# EAGLE board midi_nubbin_stencil (EAGLE 6.6.0)
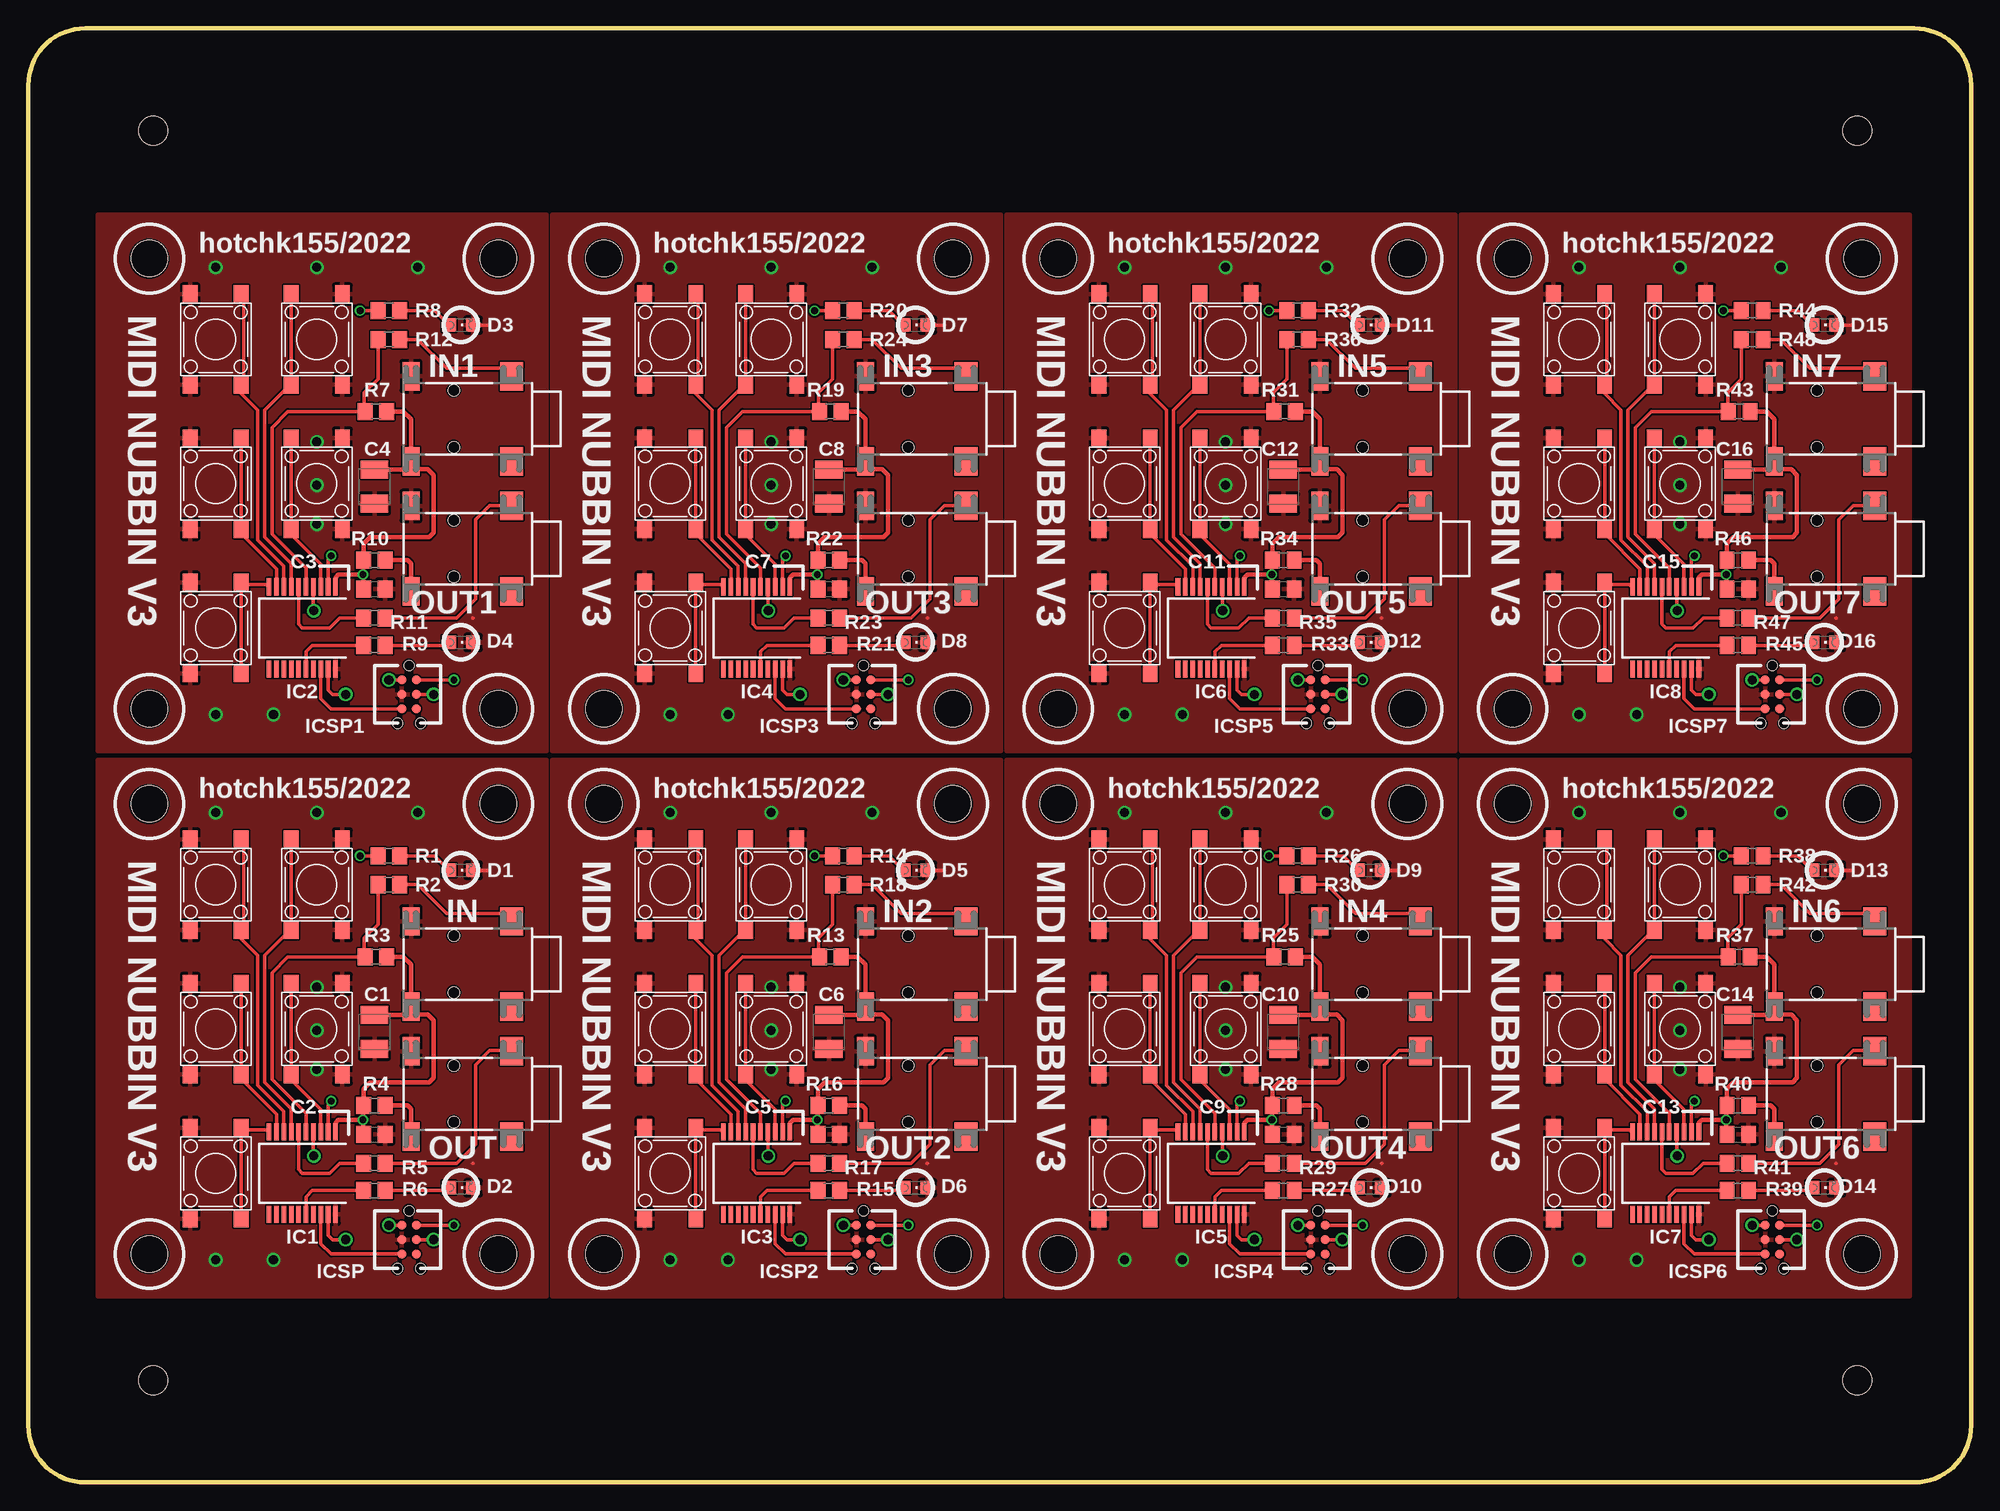
[diagram p0: board, top side]
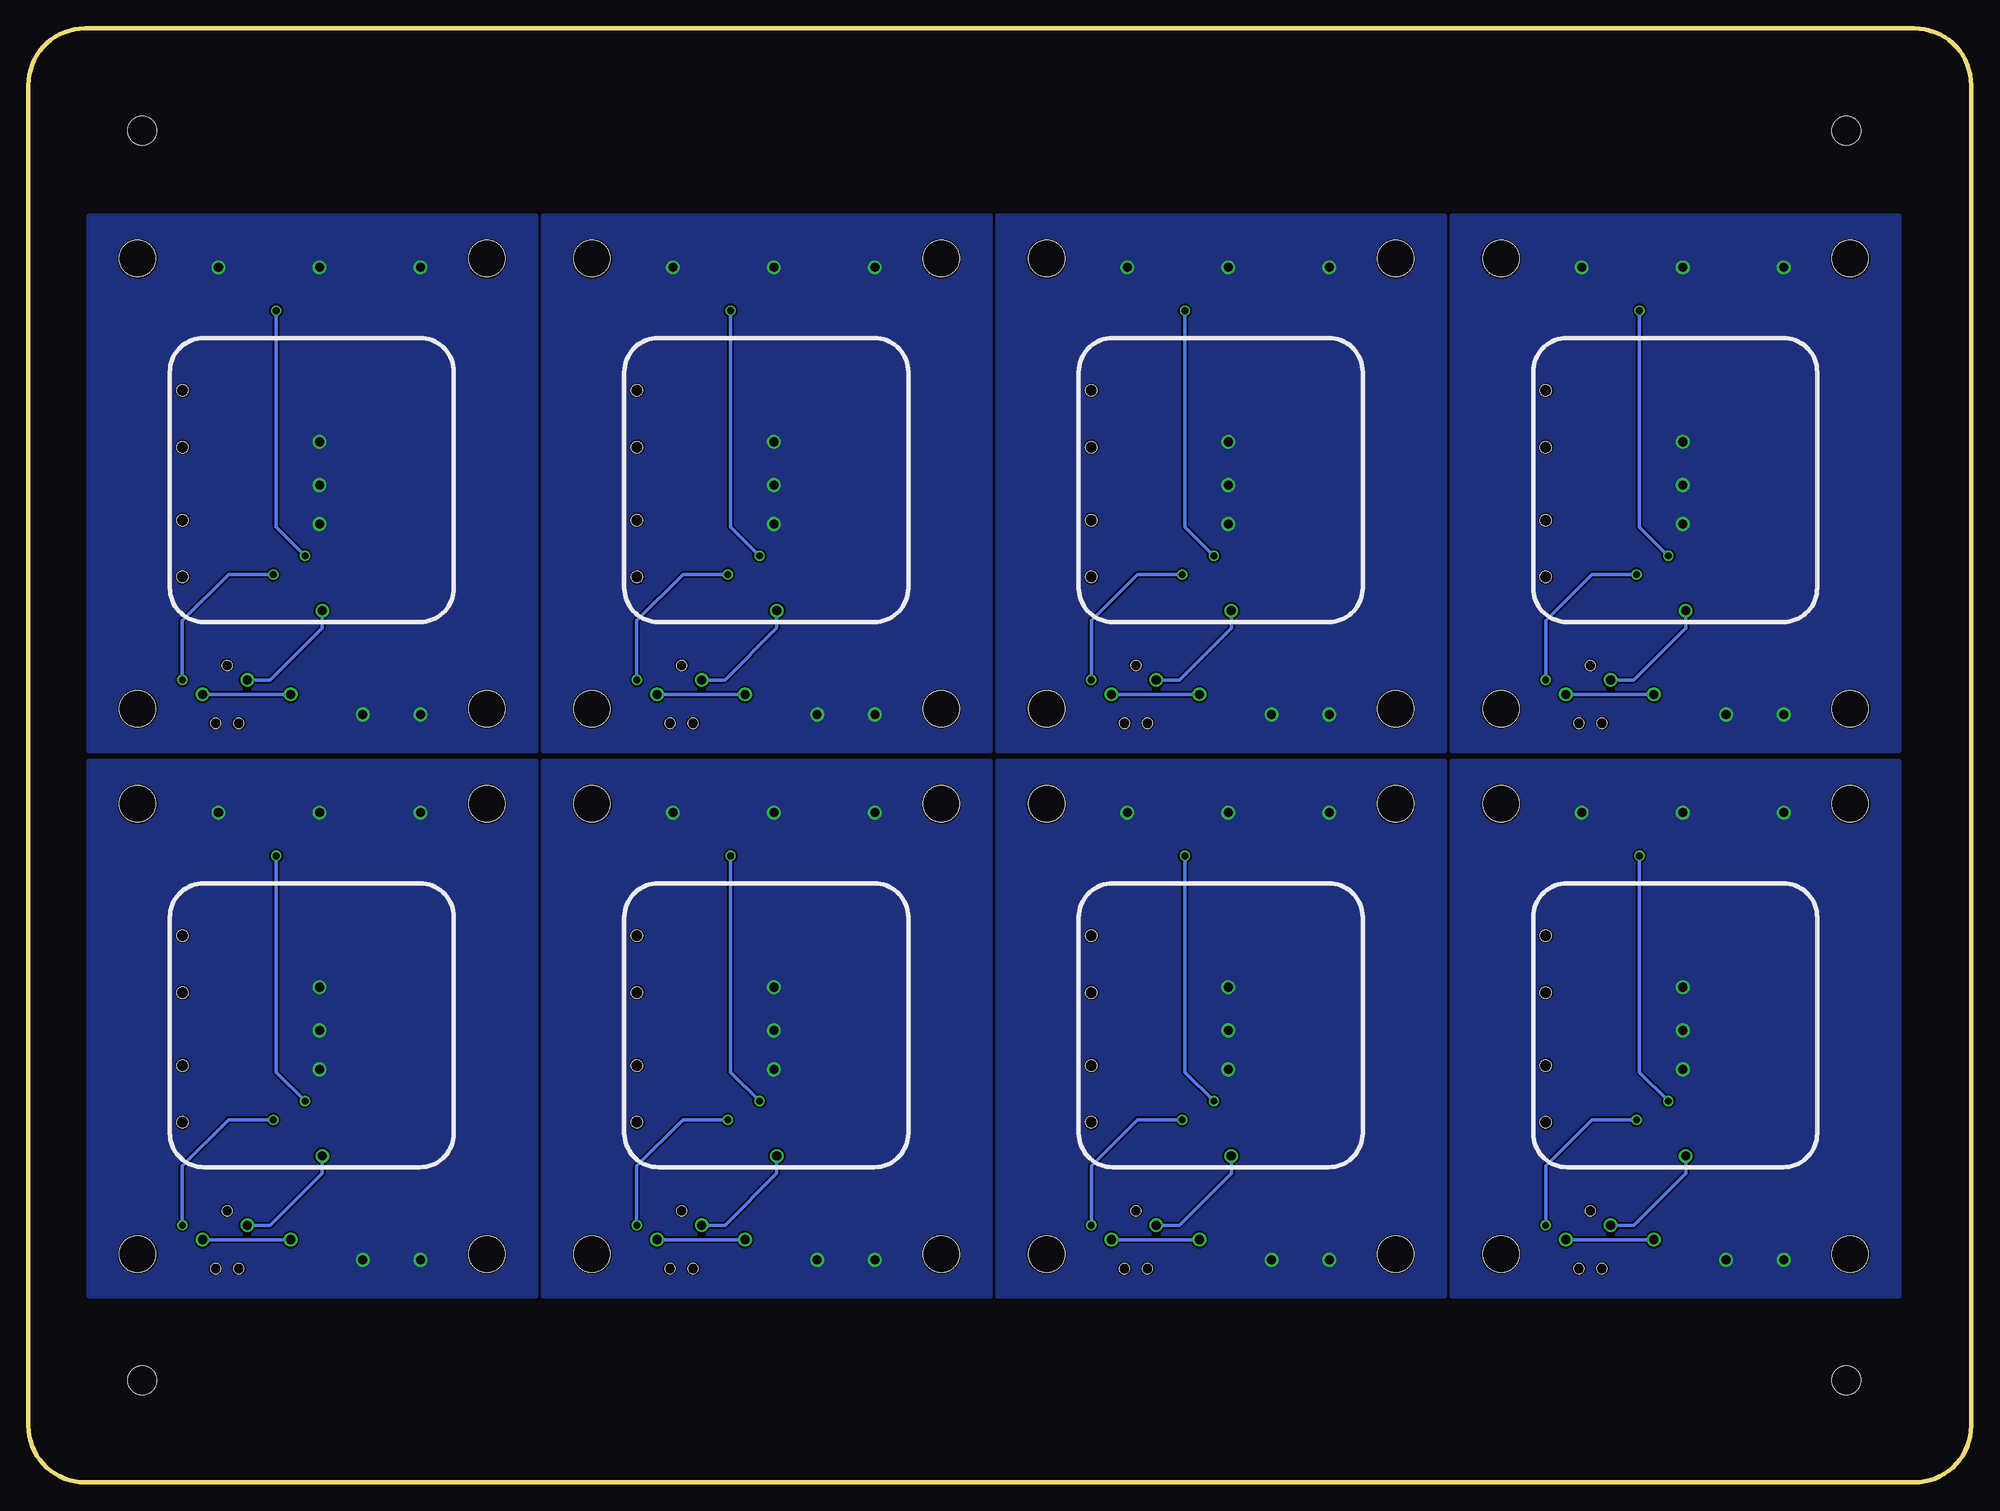
[diagram p1: board, bottom side, seen from below]

Size 171 x 128 mm. Coordinates in mm from the lower left corner, seen from the top.
Outline: 0,123 0,5 arc90 5,0 166,0 arc90 171,5 171,123 arc90 166,128 5,128 arc90 0,123
Copper layers (1*16): Top 0.035mm / dielectric 1.5mm / Bottom 0.035mm
Design rules "hackvana": minimum track width 6mil, minimum drill 0.3mm, track to track 6mil, track to pad 9mil, pad to pad 6mil, via to via 6mil, smd to smd 0mil, copper to edge 6mil, drill to drill 6mil, minimum pad ring 10mil, minimum via ring 6mil, stop-mask expansion 2mil, vias tented up to drill 100mil, thermal gap 10mil
Holes 3.2 mm at 10.65,59.73 10.65,20.11 41.38,59.73 41.38,20.11 10.65,107.73 10.65,68.11 41.38,107.73 41.38,68.11 50.65,59.73 50.65,20.11 81.38,59.73 81.38,20.11 50.65,107.73 50.65,68.11 81.38,107.73 81.38,68.11 90.65,59.73 90.65,20.11 121.38,59.73 121.38,20.11 90.65,107.73 90.65,68.11 121.38,107.73 121.38,68.11 130.65,59.73 130.65,20.11 161.38,59.73 161.38,20.11 130.65,107.73 130.65,68.11 161.38,107.73 161.38,68.11
Holes 2.54 mm at 11,119 11,9 161,119 161,9

## Footprints (pad centres in the part's own frame; a part is rotated, then mirrored left to right if it is on the bottom)
SMC_B = smd 1.6 x 2.4: + -1.5,0; - 1.5,0
C0805 = smd 1.3 x 1.5: 1 -0.95,0; 2 0.95,0
CHIPLED_0805 = smd 1.2 x 1.2: A 0,-1.05; C 0,1.05
SSOP20 = smd 0.4 x 1.5: 1 -2.925,-3.625; 2 -2.275,-3.625; 3 -1.625,-3.625; 4 -0.975,-3.625; 5 -0.325,-3.625; 6 0.325,-3.625; 7 0.975,-3.625; 8 1.625,-3.625; 9 2.275,-3.625; 10 2.925,-3.625; 11 2.925,3.625; 12 2.275,3.625; 13 1.625,3.625; 14 0.975,3.625; 15 0.325,3.625; 16 -0.325,3.625; 17 -0.975,3.625; 18 -1.625,3.625; 19 -2.275,3.625; 20 -2.925,3.625
TC2030-MCP-NL = smd 0.787 x 0.787: 1 1.27,-0.635; 2 1.27,0.635; 3 2.54,-0.635; 4 2.54,0.635; 5 3.81,-0.635; 6 3.81,0.635 | hole 0.889: 0,0; 5.08,-1.016; 5.08,1.016
1503_02 = smd 2.5 x 1.5: 1 -3.75,-10.75; 3 3.75,-10.75 | smd 2.5 x 2: 2 -3.75,-1.9; 2@2 3.75,-1.9 | hole 1: -2.5,-7; 2.5,-7
R0805 = smd 1.3 x 1.5: 1 -0.95,0; 2 0.95,0
6MMTACTSMT = smd 1.55 x 1.3: 1 -4,2.25; 2 -4,-2.25; 3 4,-2.25; 4 4,2.25

## Placement (x,y rotation side)
C1  [SMC_B]  30.46,39.67 270 top
C2  [C0805]  30.46,30.65 0 top
C3  [C0805]  30.46,78.65 0 top
C4  [SMC_B]  30.46,87.67 270 top
C5  [C0805]  70.46,30.65 0 top
C6  [SMC_B]  70.46,39.67 270 top
C7  [C0805]  70.46,78.65 0 top
C8  [SMC_B]  70.46,87.67 270 top
C9  [C0805]  110.46,30.65 0 top
C10  [SMC_B]  110.46,39.67 270 top
C11  [C0805]  110.46,78.65 0 top
C12  [SMC_B]  110.46,87.67 270 top
C13  [C0805]  150.46,30.65 0 top
C14  [SMC_B]  150.46,39.67 270 top
C15  [C0805]  150.46,78.65 0 top
C16  [SMC_B]  150.46,87.67 270 top
D1  [CHIPLED_0805]  38.08,53.89 270 top
D2  [CHIPLED_0805]  38.08,25.95 270 top
D3  [CHIPLED_0805]  38.08,101.89 270 top
D4  [CHIPLED_0805]  38.08,73.95 270 top
D5  [CHIPLED_0805]  78.08,53.89 270 top
D6  [CHIPLED_0805]  78.08,25.95 270 top
D7  [CHIPLED_0805]  78.08,101.89 270 top
D8  [CHIPLED_0805]  78.08,73.95 270 top
D9  [CHIPLED_0805]  118.08,53.89 270 top
D10  [CHIPLED_0805]  118.08,25.95 270 top
D11  [CHIPLED_0805]  118.08,101.89 270 top
D12  [CHIPLED_0805]  118.08,73.95 270 top
D13  [CHIPLED_0805]  158.08,53.89 270 top
D14  [CHIPLED_0805]  158.08,25.95 270 top
D15  [CHIPLED_0805]  158.08,101.89 270 top
D16  [CHIPLED_0805]  158.08,73.95 270 top
IC1  PIC16F15345SSOP20  [SSOP20]  24.11,27.22 180 top
IC2  PIC16F15345SSOP20  [SSOP20]  24.11,75.22 180 top
IC3  PIC16F15345SSOP20  [SSOP20]  64.11,27.22 180 top
IC4  PIC16F15345SSOP20  [SSOP20]  64.11,75.22 180 top
IC5  PIC16F15345SSOP20  [SSOP20]  104.11,27.22 180 top
IC6  PIC16F15345SSOP20  [SSOP20]  104.11,75.22 180 top
IC7  PIC16F15345SSOP20  [SSOP20]  144.11,27.22 180 top
IC8  PIC16F15345SSOP20  [SSOP20]  144.11,75.22 180 top
ICSP  [TC2030-MCP-NL]  33.51,23.92 270 top
ICSP1  [TC2030-MCP-NL]  33.51,71.92 270 top
ICSP2  [TC2030-MCP-NL]  73.51,23.92 270 top
ICSP3  [TC2030-MCP-NL]  73.51,71.92 270 top
ICSP4  [TC2030-MCP-NL]  113.51,23.92 270 top
ICSP5  [TC2030-MCP-NL]  113.51,71.92 270 top
ICSP6  [TC2030-MCP-NL]  153.51,23.92 270 top
ICSP7  [TC2030-MCP-NL]  153.51,71.92 270 top
IN  1503_02  [1503_02]  44.43,45.64 270 top
IN1  1503_02  [1503_02]  44.43,93.64 270 top
IN2  1503_02  [1503_02]  84.43,45.64 270 top
IN3  1503_02  [1503_02]  84.43,93.64 270 top
IN4  1503_02  [1503_02]  124.43,45.64 270 top
IN5  1503_02  [1503_02]  124.43,93.64 270 top
IN6  1503_02  [1503_02]  164.43,45.64 270 top
IN7  1503_02  [1503_02]  164.43,93.64 270 top
OUT  1503_02  [1503_02]  44.43,34.2 270 top
OUT1  1503_02  [1503_02]  44.43,82.2 270 top
OUT2  1503_02  [1503_02]  84.43,34.2 270 top
OUT3  1503_02  [1503_02]  84.43,82.2 270 top
OUT4  1503_02  [1503_02]  124.43,34.2 270 top
OUT5  1503_02  [1503_02]  124.43,82.2 270 top
OUT6  1503_02  [1503_02]  164.43,34.2 270 top
OUT7  1503_02  [1503_02]  164.43,82.2 270 top
R1  [R0805]  31.73,55.16 180 top
R2  220  [R0805]  31.73,52.62 0 top
R3  4k7  [R0805]  30.59,46.27 0 top
R4  [R0805]  30.46,33.19 180 top
R5  220  [R0805]  30.46,28.11 180 top
R6  [R0805]  30.46,25.7 180 top
R7  4k7  [R0805]  30.59,94.27 0 top
R8  [R0805]  31.73,103.16 180 top
R9  [R0805]  30.46,73.7 180 top
R10  [R0805]  30.46,81.19 180 top
R11  220  [R0805]  30.46,76.11 180 top
R12  220  [R0805]  31.73,100.62 0 top
R13  4k7  [R0805]  70.59,46.27 0 top
R14  [R0805]  71.73,55.16 180 top
R15  [R0805]  70.46,25.7 180 top
R16  [R0805]  70.46,33.19 180 top
R17  220  [R0805]  70.46,28.11 180 top
R18  220  [R0805]  71.73,52.62 0 top
R19  4k7  [R0805]  70.59,94.27 0 top
R20  [R0805]  71.73,103.16 180 top
R21  [R0805]  70.46,73.7 180 top
R22  [R0805]  70.46,81.19 180 top
R23  220  [R0805]  70.46,76.11 180 top
R24  220  [R0805]  71.73,100.62 0 top
R25  4k7  [R0805]  110.59,46.27 0 top
R26  [R0805]  111.73,55.16 180 top
R27  [R0805]  110.46,25.7 180 top
R28  [R0805]  110.46,33.19 180 top
R29  220  [R0805]  110.46,28.11 180 top
R30  220  [R0805]  111.73,52.62 0 top
R31  4k7  [R0805]  110.59,94.27 0 top
R32  [R0805]  111.73,103.16 180 top
R33  [R0805]  110.46,73.7 180 top
R34  [R0805]  110.46,81.19 180 top
R35  220  [R0805]  110.46,76.11 180 top
R36  220  [R0805]  111.73,100.62 0 top
R37  4k7  [R0805]  150.59,46.27 0 top
R38  [R0805]  151.73,55.16 180 top
R39  [R0805]  150.46,25.7 180 top
R40  [R0805]  150.46,33.19 180 top
R41  220  [R0805]  150.46,28.11 180 top
R42  220  [R0805]  151.73,52.62 0 top
R43  4k7  [R0805]  150.59,94.27 0 top
R44  [R0805]  151.73,103.16 180 top
R45  [R0805]  150.46,73.7 180 top
R46  [R0805]  150.46,81.19 180 top
R47  220  [R0805]  150.46,76.11 180 top
R48  220  [R0805]  151.73,100.62 0 top
SW1  6MMTACTSMT  [6MMTACTSMT]  25.38,52.62 90 top
SW2  6MMTACTSMT  [6MMTACTSMT]  25.38,39.92 90 top
SW3  6MMTACTSMT  [6MMTACTSMT]  16.49,52.62 270 top
SW4  6MMTACTSMT  [6MMTACTSMT]  16.49,75.22 270 top
SW5  6MMTACTSMT  [6MMTACTSMT]  16.49,27.22 270 top
SW6  6MMTACTSMT  [6MMTACTSMT]  16.49,87.92 270 top
SW7  6MMTACTSMT  [6MMTACTSMT]  16.49,100.62 270 top
SW8  6MMTACTSMT  [6MMTACTSMT]  25.38,100.62 90 top
SW9  6MMTACTSMT  [6MMTACTSMT]  25.38,87.92 90 top
SW10  6MMTACTSMT  [6MMTACTSMT]  56.49,27.22 270 top
SW11  6MMTACTSMT  [6MMTACTSMT]  56.49,39.92 270 top
SW12  6MMTACTSMT  [6MMTACTSMT]  56.49,52.62 270 top
SW13  6MMTACTSMT  [6MMTACTSMT]  65.38,52.62 90 top
SW14  6MMTACTSMT  [6MMTACTSMT]  65.38,39.92 90 top
SW15  6MMTACTSMT  [6MMTACTSMT]  56.49,75.22 270 top
SW16  6MMTACTSMT  [6MMTACTSMT]  56.49,87.92 270 top
SW17  6MMTACTSMT  [6MMTACTSMT]  56.49,100.62 270 top
SW18  6MMTACTSMT  [6MMTACTSMT]  65.38,100.62 90 top
SW19  6MMTACTSMT  [6MMTACTSMT]  65.38,87.92 90 top
SW20  6MMTACTSMT  [6MMTACTSMT]  96.49,27.22 270 top
SW21  6MMTACTSMT  [6MMTACTSMT]  96.49,39.92 270 top
SW22  6MMTACTSMT  [6MMTACTSMT]  96.49,52.62 270 top
SW23  6MMTACTSMT  [6MMTACTSMT]  105.38,52.62 90 top
SW24  6MMTACTSMT  [6MMTACTSMT]  105.38,39.92 90 top
SW25  6MMTACTSMT  [6MMTACTSMT]  96.49,75.22 270 top
SW26  6MMTACTSMT  [6MMTACTSMT]  96.49,87.92 270 top
SW27  6MMTACTSMT  [6MMTACTSMT]  96.49,100.62 270 top
SW28  6MMTACTSMT  [6MMTACTSMT]  105.38,100.62 90 top
SW29  6MMTACTSMT  [6MMTACTSMT]  105.38,87.92 90 top
SW30  6MMTACTSMT  [6MMTACTSMT]  136.49,27.22 270 top
SW31  6MMTACTSMT  [6MMTACTSMT]  136.49,39.92 270 top
SW32  6MMTACTSMT  [6MMTACTSMT]  136.49,52.62 270 top
SW33  6MMTACTSMT  [6MMTACTSMT]  145.38,52.62 90 top
SW34  6MMTACTSMT  [6MMTACTSMT]  145.38,39.92 90 top
SW35  6MMTACTSMT  [6MMTACTSMT]  136.49,75.22 270 top
SW36  6MMTACTSMT  [6MMTACTSMT]  136.49,87.92 270 top
SW37  6MMTACTSMT  [6MMTACTSMT]  136.49,100.62 270 top
SW38  6MMTACTSMT  [6MMTACTSMT]  145.38,100.62 90 top
SW39  6MMTACTSMT  [6MMTACTSMT]  145.38,87.92 90 top
SW45  6MMTACTSMT  [6MMTACTSMT]  16.49,39.92 270 top

## Library data of the parts
C1 C4 C6 C8 C10 C12 C14 C16 = resistor
C2 C3 C5 C7 C9 C11 C13 C15 R1-R48 = rcl
D1-D16 = adafruit
IC1-IC8 SW1-SW39 SW45 = jason_eagle6
ICSP ICSP1-ICSP7 = tag-connect
IN IN1-IN7 OUT OUT1-OUT7 = con-lumberg; OC_FARNELL: 1216979; OC_NEWARK: unknown

## Nets
+5V: C1.+ C2.1 IC1.1 ICSP.2 IN.3 R3.2 R4.2
+5V1: C3.1 C4.+ IC2.1 ICSP1.2 IN1.3 R7.2 R10.2
+5V2: C5.1 C6.+ IC3.1 ICSP2.2 IN2.3 R13.2 R16.2
+5V3: C7.1 C8.+ IC4.1 ICSP3.2 IN3.3 R19.2 R22.2
+5V4: C9.1 C10.+ IC5.1 ICSP4.2 IN4.3 R25.2 R28.2
+5V5: C11.1 C12.+ IC6.1 ICSP5.2 IN5.3 R31.2 R34.2
+5V6: C13.1 C14.+ IC7.1 ICSP6.2 IN6.3 R37.2 R40.2
+5V7: C15.1 C16.+ IC8.1 ICSP7.2 IN7.3 R43.2 R46.2
GND: C1.- C2.2 D1.C D2.C IC1.20 ICSP.3 IN.1 OUT.1 SW1.2 SW1.3 SW2.2 SW2.3 SW3.2 SW3.3 SW5.2 SW5.3 SW45.2 SW45.3
GND1: C3.2 C4.- D3.C D4.C IC2.20 ICSP1.3 IN1.1 OUT1.1 SW4.2 SW4.3 SW6.2 SW6.3 SW7.2 SW7.3 SW8.2 SW8.3 SW9.2 SW9.3
GND2: C5.2 C6.- D5.C D6.C IC3.20 ICSP2.3 IN2.1 OUT2.1 SW10.2 SW10.3 SW11.2 SW11.3 SW12.2 SW12.3 SW13.2 SW13.3 SW14.2 SW14.3
GND3: C7.2 C8.- D7.C D8.C IC4.20 ICSP3.3 IN3.1 OUT3.1 SW15.2 SW15.3 SW16.2 SW16.3 SW17.2 SW17.3 SW18.2 SW18.3 SW19.2 SW19.3
GND4: C9.2 C10.- D9.C D10.C IC5.20 ICSP4.3 IN4.1 OUT4.1 SW20.2 SW20.3 SW21.2 SW21.3 SW22.2 SW22.3 SW23.2 SW23.3 SW24.2 SW24.3
GND5: C11.2 C12.- D11.C D12.C IC6.20 ICSP5.3 IN5.1 OUT5.1 SW25.2 SW25.3 SW26.2 SW26.3 SW27.2 SW27.3 SW28.2 SW28.3 SW29.2 SW29.3
GND6: C13.2 C14.- D13.C D14.C IC7.20 ICSP6.3 IN6.1 OUT6.1 SW30.2 SW30.3 SW31.2 SW31.3 SW32.2 SW32.3 SW33.2 SW33.3 SW34.2 SW34.3
GND7: C15.2 C16.- D15.C D16.C IC8.20 ICSP7.3 IN7.1 OUT7.1 SW35.2 SW35.3 SW36.2 SW36.3 SW37.2 SW37.3 SW38.2 SW38.3 SW39.2 SW39.3
KEY1: IC1.3 SW2.1 SW2.4
KEY2: IC1.7 SW1.1 SW1.4
KEY3: IC1.8 SW3.1 SW3.4
KEY4: IC1.9 SW45.1 SW45.4
KEY5: IC1.10 SW5.1 SW5.4
KEY6: IC2.8 SW7.1 SW7.4
KEY7: IC2.3 SW9.1 SW9.4
KEY8: IC2.7 SW8.1 SW8.4
KEY9: IC2.9 SW6.1 SW6.4
KEY10: IC2.10 SW4.1 SW4.4
KEY11: IC3.8 SW12.1 SW12.4
KEY12: IC3.3 SW14.1 SW14.4
KEY13: IC3.7 SW13.1 SW13.4
KEY14: IC3.9 SW11.1 SW11.4
KEY15: IC3.10 SW10.1 SW10.4
KEY16: IC4.8 SW17.1 SW17.4
KEY17: IC4.3 SW19.1 SW19.4
KEY18: IC4.7 SW18.1 SW18.4
KEY19: IC4.9 SW16.1 SW16.4
KEY20: IC4.10 SW15.1 SW15.4
KEY21: IC5.8 SW22.1 SW22.4
KEY22: IC5.3 SW24.1 SW24.4
KEY23: IC5.7 SW23.1 SW23.4
KEY24: IC5.9 SW21.1 SW21.4
KEY25: IC5.10 SW20.1 SW20.4
KEY26: IC6.8 SW27.1 SW27.4
KEY27: IC6.3 SW29.1 SW29.4
KEY28: IC6.7 SW28.1 SW28.4
KEY29: IC6.9 SW26.1 SW26.4
KEY30: IC6.10 SW25.1 SW25.4
KEY31: IC7.8 SW32.1 SW32.4
KEY32: IC7.3 SW34.1 SW34.4
KEY33: IC7.7 SW33.1 SW33.4
KEY34: IC7.9 SW31.1 SW31.4
KEY35: IC7.10 SW30.1 SW30.4
KEY36: IC8.8 SW37.1 SW37.4
KEY37: IC8.3 SW39.1 SW39.4
KEY38: IC8.7 SW38.1 SW38.4
KEY39: IC8.9 SW36.1 SW36.4
KEY40: IC8.10 SW35.1 SW35.4
LED1: IC1.2 R1.2
LED2: IC1.16 R6.2
LED3: IC2.2 R8.2
LED4: IC2.16 R9.2
LED5: IC3.2 R14.2
LED6: IC3.16 R15.2
LED7: IC4.2 R20.2
LED8: IC4.16 R21.2
LED9: IC5.2 R26.2
LED10: IC5.16 R27.2
LED11: IC6.2 R32.2
LED12: IC6.16 R33.2
LED13: IC7.2 R38.2
LED14: IC7.16 R39.2
LED15: IC8.2 R44.2
LED16: IC8.16 R45.2
N$1: D1.A R1.1
N$2: D2.A R6.1
N$3: OUT.3 R4.1
N$4: OUT.2 R5.1
N$5: IN.2 R2.2
N$6: D3.A R8.1
N$7: D4.A R9.1
N$8: OUT1.3 R10.1
N$9: OUT1.2 R11.1
N$10: IN1.2 R12.2
N$11: D5.A R14.1
N$12: D6.A R15.1
N$13: OUT2.3 R16.1
N$14: OUT2.2 R17.1
N$15: IN2.2 R18.2
N$16: D7.A R20.1
N$17: D8.A R21.1
N$18: OUT3.3 R22.1
N$19: OUT3.2 R23.1
N$20: IN3.2 R24.2
N$21: D9.A R26.1
N$22: D10.A R27.1
N$23: OUT4.3 R28.1
N$24: OUT4.2 R29.1
N$25: IN4.2 R30.2
N$26: D11.A R32.1
N$27: D12.A R33.1
N$28: OUT5.3 R34.1
N$29: OUT5.2 R35.1
N$30: IN5.2 R36.2
N$31: D13.A R38.1
N$32: D14.A R39.1
N$33: OUT6.3 R40.1
N$34: OUT6.2 R41.1
N$35: IN6.2 R42.2
N$36: D15.A R44.1
N$37: D16.A R45.1
N$38: OUT7.3 R46.1
N$39: OUT7.2 R47.1
N$40: IN7.2 R48.2
PGC: IC1.18 ICSP.5
PGC1: IC2.18 ICSP1.5
PGC2: IC3.18 ICSP2.5
PGC3: IC4.18 ICSP3.5
PGC4: IC5.18 ICSP4.5
PGC5: IC6.18 ICSP5.5
PGC6: IC7.18 ICSP6.5
PGC7: IC8.18 ICSP7.5
PGD: IC1.19 ICSP.4
PGD1: IC2.19 ICSP1.4
PGD2: IC3.19 ICSP2.4
PGD3: IC4.19 ICSP3.4
PGD4: IC5.19 ICSP4.4
PGD5: IC6.19 ICSP5.4
PGD6: IC7.19 ICSP6.4
PGD7: IC8.19 ICSP7.4
RX: IC1.5 R2.1 R3.1
RX1: IC2.5 R7.1 R12.1
RX2: IC3.5 R13.1 R18.1
RX3: IC4.5 R19.1 R24.1
RX4: IC5.5 R25.1 R30.1
RX5: IC6.5 R31.1 R36.1
RX6: IC7.5 R37.1 R42.1
RX7: IC8.5 R43.1 R48.1
TX: IC1.6 R5.2
TX1: IC2.6 R11.2
TX2: IC3.6 R17.2
TX3: IC4.6 R23.2
TX4: IC5.6 R29.2
TX5: IC6.6 R35.2
TX6: IC7.6 R41.2
TX7: IC8.6 R47.2
VPP: IC1.4 ICSP.1
VPP1: IC2.4 ICSP1.1
VPP2: IC3.4 ICSP2.1
VPP3: IC4.4 ICSP3.1
VPP4: IC5.4 ICSP4.1
VPP5: IC6.4 ICSP5.1
VPP6: IC7.4 ICSP6.1
VPP7: IC8.4 ICSP7.1

## Tracks (layer width: path | path; a pad name or v marks a point on that pad's centre or on a via)
+5V  (via drill 0.6)
  Top 0.305: 27.04,30.65 IC1.1 | ICSP.2 v37.45,22.65
  Top 0.406: R3.2 33,46.27 33.68,45.59 IN.3 33.25,41.45 | C1.+ 32.96,41.17 33.25,41.45 | 33.25,41.45 33.5,41.45 33.76,41.19 35.16,41.19 35.67,40.68 35.67,35.6 35.29,35.22 30.08,35.22 29.51,34.65 R4.2 29.44,33.12 v29.44,31.92 | IC1.1 27.04,31.67 27.29,31.92 v29.44,31.92 | v29.44,31.92 29.44,30.71 C2.1
  Bottom 0.305: v37.45,22.65 37.45,27.86 33.38,31.92 v29.44,31.92
+5V1  (via drill 0.6)
  Top 0.305: 27.04,78.65 IC2.1 | ICSP1.2 v37.45,70.65
  Top 0.406: R7.2 33,94.27 33.68,93.59 IN1.3 33.25,89.45 | C4.+ 32.96,89.17 33.25,89.45 | 33.25,89.45 33.5,89.45 33.76,89.19 35.16,89.19 35.67,88.68 35.67,83.6 35.29,83.22 30.08,83.22 29.51,82.65 R10.2 29.44,81.12 v29.44,79.92 | IC2.1 27.04,79.67 27.29,79.92 v29.44,79.92 | v29.44,79.92 29.44,78.72 C3.1
  Bottom 0.305: v37.45,70.65 37.45,75.85 33.38,79.92 v29.44,79.92
+5V2  (via drill 0.6)
  Top 0.305: 67.03,30.65 IC3.1 | ICSP2.2 v77.44,22.65
  Top 0.406: R13.2 73,46.27 73.68,45.59 IN2.3 73.25,41.45 | C6.+ 72.96,41.17 73.25,41.45 | 73.25,41.45 73.5,41.45 73.76,41.19 75.16,41.19 75.67,40.68 75.67,35.6 75.29,35.22 70.08,35.22 69.51,34.65 R16.2 69.44,33.12 v69.44,31.92 | IC3.1 67.03,31.67 67.28,31.92 v69.44,31.92 | v69.44,31.92 69.44,30.71 C5.1
  Bottom 0.305: v77.44,22.65 77.44,27.86 73.38,31.92 v69.44,31.92
+5V3  (via drill 0.6)
  Top 0.305: 67.03,78.65 IC4.1 | ICSP3.2 v77.44,70.65
  Top 0.406: R19.2 73,94.27 73.68,93.59 IN3.3 73.25,89.45 | C8.+ 72.96,89.17 73.25,89.45 | 73.25,89.45 73.5,89.45 73.76,89.19 75.16,89.19 75.67,88.68 75.67,83.6 75.29,83.22 70.08,83.22 69.51,82.65 R22.2 69.44,81.12 v69.44,79.92 | IC4.1 67.03,79.67 67.28,79.92 v69.44,79.92 | v69.44,79.92 69.44,78.72 C7.1
  Bottom 0.305: v77.44,70.65 77.44,75.85 73.38,79.92 v69.44,79.92
+5V4  (via drill 0.6)
  Top 0.305: 107.03,30.65 IC5.1 | ICSP4.2 v117.44,22.65
  Top 0.406: R25.2 113,46.27 113.68,45.59 IN4.3 113.25,41.45 | C10.+ 112.96,41.17 113.25,41.45 | 113.25,41.45 113.5,41.45 113.76,41.19 115.16,41.19 115.67,40.68 115.67,35.6 115.29,35.22 110.08,35.22 109.51,34.65 R28.2 109.44,33.12 v109.44,31.92 | IC5.1 107.03,31.67 107.28,31.92 v109.44,31.92 | v109.44,31.92 109.44,30.71 C9.1
  Bottom 0.305: v117.44,22.65 117.44,27.86 113.38,31.92 v109.44,31.92
+5V5  (via drill 0.6)
  Top 0.305: 107.03,78.65 IC6.1 | ICSP5.2 v117.44,70.65
  Top 0.406: R31.2 113,94.27 113.68,93.59 IN5.3 113.25,89.45 | C12.+ 112.96,89.17 113.25,89.45 | 113.25,89.45 113.5,89.45 113.76,89.19 115.16,89.19 115.67,88.68 115.67,83.6 115.29,83.22 110.08,83.22 109.51,82.65 R34.2 109.44,81.12 v109.44,79.92 | IC6.1 107.03,79.67 107.28,79.92 v109.44,79.92 | v109.44,79.92 109.44,78.72 C11.1
  Bottom 0.305: v117.44,70.65 117.44,75.85 113.38,79.92 v109.44,79.92
+5V6  (via drill 0.6)
  Top 0.305: 147.03,30.65 IC7.1 | ICSP6.2 v157.44,22.65
  Top 0.406: R37.2 153,46.27 153.68,45.59 IN6.3 153.25,41.45 | C14.+ 152.96,41.17 153.25,41.45 | 153.25,41.45 153.5,41.45 153.76,41.19 155.16,41.19 155.67,40.68 155.67,35.6 155.29,35.22 150.08,35.22 149.51,34.65 R40.2 149.44,33.12 v149.44,31.92 | IC7.1 147.03,31.67 147.28,31.92 v149.44,31.92 | v149.44,31.92 149.44,30.71 C13.1
  Bottom 0.305: v157.44,22.65 157.44,27.86 153.38,31.92 v149.44,31.92
+5V7  (via drill 0.6)
  Top 0.305: 147.03,78.65 IC8.1 | ICSP7.2 v157.44,70.65
  Top 0.406: R43.2 153,94.27 153.68,93.59 IN7.3 153.25,89.45 | C16.+ 152.96,89.17 153.25,89.45 | 153.25,89.45 153.5,89.45 153.76,89.19 155.16,89.19 155.67,88.68 155.67,83.6 155.29,83.22 150.08,83.22 149.51,82.65 R46.2 149.44,81.12 v149.44,79.92 | IC8.1 147.03,79.67 147.28,79.92 v149.44,79.92 | v149.44,79.92 149.44,78.72 C15.1
  Bottom 0.305: v157.44,70.65 157.44,75.85 153.38,79.92 v149.44,79.92
GND  (via drill 0.8)
  Top 0.305: D1.C 40.62,53.89 | 39.13,28.07 39.1,28.11
  other vias: 16.49,58.97 25.38,58.97 34.27,58.97 16.49,19.6 21.57,19.6 25.38,43.6 25.38,36.36 25.38,39.79
  pour Top: 6.1,63.6 45.6,63.6 45.6,16.4 6.1,16.4
  pour Bottom: 6.3,63.5 45.7,63.5 45.7,16.4 6.3,16.4
GND1  (via drill 0.8)
  Top 0.305: D3.C 40.62,101.89 | 39.13,76.08 39.1,76.11
  other vias: 16.49,106.97 25.38,106.97 34.27,106.97 16.49,67.6 21.57,67.6 25.38,91.6 25.38,84.36 25.38,87.79
  pour Top: 6.1,111.6 45.6,111.6 45.6,64.4 6.1,64.4
  pour Bottom: 6.3,111.5 45.7,111.5 45.7,64.4 6.3,64.4
GND2  (via drill 0.8)
  Top 0.305: D5.C 80.62,53.89 | 79.13,28.07 79.1,28.11
  other vias: 56.49,58.97 65.38,58.97 74.27,58.97 56.49,19.6 61.57,19.6 65.38,43.6 65.38,36.36 65.38,39.79
  pour Top: 46.1,63.6 85.6,63.6 85.6,16.4 46.1,16.4
  pour Bottom: 46.3,63.5 85.7,63.5 85.7,16.4 46.3,16.4
GND3  (via drill 0.8)
  Top 0.305: D7.C 80.62,101.89 | 79.13,76.08 79.1,76.11
  other vias: 56.49,106.97 65.38,106.97 74.27,106.97 56.49,67.6 61.57,67.6 65.38,91.6 65.38,84.36 65.38,87.79
  pour Top: 46.1,111.6 85.6,111.6 85.6,64.4 46.1,64.4
  pour Bottom: 46.3,111.5 85.7,111.5 85.7,64.4 46.3,64.4
GND4  (via drill 0.8)
  Top 0.305: D9.C 120.62,53.89 | 119.13,28.07 119.1,28.11
  other vias: 96.49,58.97 105.38,58.97 114.27,58.97 96.49,19.6 101.57,19.6 105.38,43.6 105.38,36.36 105.38,39.79
  pour Top: 86.1,63.6 125.6,63.6 125.6,16.4 86.1,16.4
  pour Bottom: 86.3,63.5 125.7,63.5 125.7,16.4 86.3,16.4
GND5  (via drill 0.8)
  Top 0.305: D11.C 120.62,101.89 | 119.13,76.08 119.1,76.11
  other vias: 96.49,106.97 105.38,106.97 114.27,106.97 96.49,67.6 101.57,67.6 105.38,91.6 105.38,84.36 105.38,87.79
  pour Top: 86.1,111.6 125.6,111.6 125.6,64.4 86.1,64.4
  pour Bottom: 86.3,111.5 125.7,111.5 125.7,64.4 86.3,64.4
GND6  (via drill 0.8)
  Top 0.305: D13.C 160.62,53.89 | 159.13,28.07 159.1,28.11
  other vias: 136.49,58.97 145.38,58.97 154.27,58.97 136.49,19.6 141.57,19.6 145.38,43.6 145.38,36.36 145.38,39.79
  pour Top: 126.1,63.6 165.6,63.6 165.6,16.4 126.1,16.4
  pour Bottom: 126.3,63.5 165.7,63.5 165.7,16.4 126.3,16.4
GND7  (via drill 0.8)
  Top 0.305: D15.C 160.62,101.89 | 159.13,76.08 159.1,76.11
  other vias: 136.49,106.97 145.38,106.97 154.27,106.97 136.49,67.6 141.57,67.6 145.38,91.6 145.38,84.36 145.38,87.79
  pour Top: 126.1,111.6 165.6,111.6 165.6,64.4 126.1,64.4
  pour Bottom: 126.3,111.5 165.7,111.5 165.7,64.4 126.3,64.4
KEY1
  Top 0.305: SW2.4 SW2.1 23.13,35.44 25.73,32.83 IC1.3
KEY2
  Top 0.305: IC1.7 23.14,32.89 20.81,35.22 20.81,46.4 22.46,48.05 22.56,48.05 SW1.1 | SW1.1 22.94,48.81 22.84,48.81 22.84,48.68 | SW1.4 SW1.1
KEY3
  Top 0.305: IC1.8 22.48,32.66 20.17,34.97 20.17,46.4 18.74,47.83 SW3.4 18.93,48.81 | 19.03,48.81 18.93,48.81 | SW3.1 18.93,56.43 18.93,48.81
KEY4
  Top 0.305: IC1.9 21.84,32.42 18.74,35.51 SW45.4 | SW45.4 18.84,35.92 19.03,36.11 | SW45.1 SW45.4
KEY5
  Top 0.305: IC1.10 21.19,30.78 20.94,31.03 18.93,31.03 SW5.1 SW5.4
KEY6
  Top 0.305: IC2.8 22.48,80.66 20.17,82.97 20.17,94.4 18.74,95.83 SW7.4 18.93,96.81 | 19.03,96.81 18.93,96.81 | SW7.1 18.93,104.43 18.93,96.81
KEY7
  Top 0.305: SW9.4 SW9.1 23.13,83.44 25.73,80.83 IC2.3
KEY8
  Top 0.305: IC2.7 23.14,80.89 20.81,83.22 20.81,94.4 22.46,96.05 22.56,96.05 SW8.1 | SW8.1 22.94,96.81 22.84,96.81 22.84,96.68 | SW8.4 SW8.1
KEY9
  Top 0.305: IC2.9 21.84,80.42 18.74,83.51 SW6.4 | SW6.4 18.84,83.92 19.03,84.11 | SW6.1 SW6.4
KEY10
  Top 0.305: IC2.10 21.19,78.78 20.94,79.03 18.93,79.03 SW4.1 SW4.4
KEY11
  Top 0.305: IC3.8 62.48,32.66 60.17,34.97 60.17,46.4 58.74,47.83 SW12.4 58.93,48.81 | 59.03,48.81 58.93,48.81 | SW12.1 58.93,56.43 58.93,48.81
KEY12
  Top 0.305: SW14.4 SW14.1 63.13,35.44 65.73,32.83 IC3.3
KEY13
  Top 0.305: IC3.7 63.13,32.89 60.81,35.22 60.81,46.4 62.46,48.05 62.56,48.05 SW13.1 | SW13.1 62.94,48.81 62.84,48.81 62.84,48.68 | SW13.4 SW13.1
KEY14
  Top 0.305: IC3.9 61.84,32.42 58.74,35.51 SW11.4 | SW11.4 58.84,35.92 59.03,36.11 | SW11.1 SW11.4
KEY15
  Top 0.305: IC3.10 61.19,30.78 60.94,31.03 58.93,31.03 SW10.1 SW10.4
KEY16
  Top 0.305: IC4.8 62.48,80.66 60.17,82.97 60.17,94.4 58.74,95.83 SW17.4 58.93,96.81 | 59.03,96.81 58.93,96.81 | SW17.1 58.93,104.43 58.93,96.81
KEY17
  Top 0.305: SW19.4 SW19.1 63.13,83.44 65.73,80.83 IC4.3
KEY18
  Top 0.305: IC4.7 63.13,80.89 60.81,83.22 60.81,94.4 62.46,96.05 62.56,96.05 SW18.1 | SW18.1 62.94,96.81 62.84,96.81 62.84,96.68 | SW18.4 SW18.1
KEY19
  Top 0.305: IC4.9 61.84,80.42 58.74,83.51 SW16.4 | SW16.4 58.84,83.92 59.03,84.11 | SW16.1 SW16.4
KEY20
  Top 0.305: IC4.10 61.19,78.78 60.94,79.03 58.93,79.03 SW15.1 SW15.4
KEY21
  Top 0.305: IC5.8 102.48,32.66 100.17,34.97 100.17,46.4 98.74,47.83 SW22.4 98.93,48.81 | 99.03,48.81 98.93,48.81 | SW22.1 98.93,56.43 98.93,48.81
KEY22
  Top 0.305: SW24.4 SW24.1 103.13,35.44 105.73,32.83 IC5.3
KEY23
  Top 0.305: IC5.7 103.14,32.89 100.81,35.22 100.81,46.4 102.46,48.05 102.56,48.05 SW23.1 | SW23.1 102.94,48.81 102.84,48.81 102.84,48.68 | SW23.4 SW23.1
KEY24
  Top 0.305: IC5.9 101.83,32.42 98.74,35.51 SW21.4 | SW21.4 98.84,35.92 99.03,36.11 | SW21.1 SW21.4
KEY25
  Top 0.305: IC5.10 101.19,30.78 100.94,31.03 98.93,31.03 SW20.1 SW20.4
KEY26
  Top 0.305: IC6.8 102.48,80.66 100.17,82.97 100.17,94.4 98.74,95.83 SW27.4 98.93,96.81 | 99.03,96.81 98.93,96.81 | SW27.1 98.93,104.43 98.93,96.81
KEY27
  Top 0.305: SW29.4 SW29.1 103.13,83.44 105.73,80.83 IC6.3
KEY28
  Top 0.305: IC6.7 103.14,80.89 100.81,83.22 100.81,94.4 102.46,96.05 102.56,96.05 SW28.1 | SW28.1 102.94,96.81 102.84,96.81 102.84,96.68 | SW28.4 SW28.1
KEY29
  Top 0.305: IC6.9 101.83,80.42 98.74,83.51 SW26.4 | SW26.4 98.84,83.92 99.03,84.11 | SW26.1 SW26.4
KEY30
  Top 0.305: IC6.10 101.19,78.78 100.94,79.03 98.93,79.03 SW25.1 SW25.4
KEY31
  Top 0.305: IC7.8 142.49,32.66 140.17,34.97 140.17,46.4 138.74,47.83 SW32.4 138.93,48.81 | 139.03,48.81 138.93,48.81 | SW32.1 138.93,56.43 138.93,48.81
KEY32
  Top 0.305: SW34.4 SW34.1 143.13,35.44 145.74,32.83 IC7.3
KEY33
  Top 0.305: IC7.7 143.13,32.89 140.81,35.22 140.81,46.4 142.46,48.05 142.56,48.05 SW33.1 | SW33.1 142.94,48.81 142.84,48.81 142.84,48.68 | SW33.4 SW33.1
KEY34
  Top 0.305: IC7.9 141.84,32.42 138.74,35.51 SW31.4 | SW31.4 138.84,35.92 139.03,36.11 | SW31.1 SW31.4
KEY35
  Top 0.305: IC7.10 141.19,30.78 140.94,31.03 138.93,31.03 SW30.1 SW30.4
KEY36
  Top 0.305: IC8.8 142.49,80.66 140.17,82.97 140.17,94.4 138.74,95.83 SW37.4 138.93,96.81 | 139.03,96.81 138.93,96.81 | SW37.1 138.93,104.43 138.93,96.81
KEY37
  Top 0.305: SW39.4 SW39.1 143.13,83.44 145.74,80.83 IC8.3
KEY38
  Top 0.305: IC8.7 143.13,80.89 140.81,83.22 140.81,94.4 142.46,96.05 142.56,96.05 SW38.1 | SW38.1 142.94,96.81 142.84,96.81 142.84,96.68 | SW38.4 SW38.1
KEY39
  Top 0.305: IC8.9 141.84,80.42 138.74,83.51 SW36.4 | SW36.4 138.84,83.92 139.03,84.11 | SW36.1 SW36.4
KEY40
  Top 0.305: IC8.10 141.19,78.78 140.94,79.03 138.93,79.03 SW35.1 SW35.4
LED1  (via drill 0.6)
  Top 0.305: IC1.2 26.39,33.3 v26.65,33.57 | v29.19,55.16 R1.2
  Bottom 0.305: v26.65,33.57 29.19,36.11 v29.19,55.16
LED2
  Top 0.305: IC1.16 24.43,25.13 25,25.7 R6.2
LED3  (via drill 0.6)
  Top 0.305: IC2.2 26.39,81.31 v26.65,81.57 | v29.19,103.16 R8.2
  Bottom 0.305: v26.65,81.57 29.19,84.11 v29.19,103.16
LED4
  Top 0.305: IC2.16 24.43,73.13 25,73.7 R9.2
LED5  (via drill 0.6)
  Top 0.305: IC3.2 66.38,33.3 v66.65,33.57 | v69.19,55.16 R14.2
  Bottom 0.305: v66.65,33.57 69.19,36.11 v69.19,55.16
LED6
  Top 0.305: IC3.16 64.44,25.13 65,25.7 R15.2
LED7  (via drill 0.6)
  Top 0.305: IC4.2 66.38,81.31 v66.65,81.57 | v69.19,103.16 R20.2
  Bottom 0.305: v66.65,81.57 69.19,84.11 v69.19,103.16
LED8
  Top 0.305: IC4.16 64.44,73.13 65,73.7 R21.2
LED9  (via drill 0.6)
  Top 0.305: IC5.2 106.39,33.3 v106.65,33.57 | v109.19,55.16 R26.2
  Bottom 0.305: v106.65,33.57 109.19,36.11 v109.19,55.16
LED10
  Top 0.305: IC5.16 104.44,25.13 105,25.7 R27.2
LED11  (via drill 0.6)
  Top 0.305: IC6.2 106.39,81.31 v106.65,81.57 | v109.19,103.16 R32.2
  Bottom 0.305: v106.65,81.57 109.19,84.11 v109.19,103.16
LED12
  Top 0.305: IC6.16 104.44,73.13 105,73.7 R33.2
LED13  (via drill 0.6)
  Top 0.305: IC7.2 146.38,33.3 v146.65,33.57 | v149.19,55.16 R38.2
  Bottom 0.305: v146.65,33.57 149.19,36.11 v149.19,55.16
LED14
  Top 0.305: IC7.16 144.44,25.13 145,25.7 R39.2
LED15  (via drill 0.6)
  Top 0.305: IC8.2 146.38,81.31 v146.65,81.57 | v149.19,103.16 R44.2
  Bottom 0.305: v146.65,81.57 149.19,84.11 v149.19,103.16
LED16
  Top 0.305: IC8.16 144.44,73.13 145,73.7 R45.2
N$1
  Top 0.305: R1.1 35.76,55.16 D1.A
N$2
  Top 0.305: R6.1 36.78,25.7 D2.A
N$3
  Top 0.305: 34.27,31.03 34.25,31.03 OUT.3
  Top 0.406: OUT.3 33.68,32.89 33.38,33.19 R4.1
N$4
  Top 0.305: R5.1 37.7,28.11 39.35,29.76 39.35,36.75 40.62,38.02 42.52,38.02 43.16,38.65 43.16,38.59 OUT.2
N$5
  Top 0.305: R2.2 34.27,52.62 36.81,50.08 43.16,50.08 43.16,50.02 IN.2
N$6
  Top 0.305: R8.1 35.76,103.16 D3.A
N$7
  Top 0.305: R9.1 36.78,73.7 D4.A
N$8
  Top 0.305: 34.27,79.03 34.25,79.03 OUT1.3
  Top 0.406: OUT1.3 33.68,80.89 33.38,81.19 R10.1
N$9
  Top 0.305: R11.1 37.7,76.11 39.35,77.76 39.35,84.75 40.62,86.02 42.52,86.02 43.16,86.65 43.16,86.58 OUT1.2
N$10
  Top 0.305: R12.2 34.27,100.62 36.81,98.08 43.16,98.08 43.16,98.02 IN1.2
N$11
  Top 0.305: R14.1 75.76,55.16 D5.A
N$12
  Top 0.305: R15.1 76.78,25.7 D6.A
N$13
  Top 0.305: 74.27,31.03 74.25,31.03 OUT2.3
  Top 0.406: OUT2.3 73.68,32.89 73.38,33.19 R16.1
N$14
  Top 0.305: R17.1 77.7,28.11 79.35,29.76 79.35,36.75 80.62,38.02 82.53,38.02 83.16,38.65 83.16,38.59 OUT2.2
N$15
  Top 0.305: R18.2 74.27,52.62 76.81,50.08 83.16,50.08 83.16,50.02 IN2.2
N$16
  Top 0.305: R20.1 75.76,103.16 D7.A
N$17
  Top 0.305: R21.1 76.78,73.7 D8.A
N$18
  Top 0.305: 74.27,79.03 74.25,79.03 OUT3.3
  Top 0.406: OUT3.3 73.68,80.89 73.38,81.19 R22.1
N$19
  Top 0.305: R23.1 77.7,76.11 79.35,77.76 79.35,84.75 80.62,86.02 82.53,86.02 83.16,86.65 83.16,86.58 OUT3.2
N$20
  Top 0.305: R24.2 74.27,100.62 76.81,98.08 83.16,98.08 83.16,98.02 IN3.2
N$21
  Top 0.305: R26.1 115.76,55.16 D9.A
N$22
  Top 0.305: R27.1 116.78,25.7 D10.A
N$23
  Top 0.305: 114.27,31.03 114.25,31.03 OUT4.3
  Top 0.406: OUT4.3 113.68,32.89 113.38,33.19 R28.1
N$24
  Top 0.305: R29.1 117.7,28.11 119.35,29.76 119.35,36.75 120.62,38.02 122.53,38.02 123.16,38.65 123.16,38.59 OUT4.2
N$25
  Top 0.305: R30.2 114.27,52.62 116.81,50.08 123.16,50.08 123.16,50.02 IN4.2
N$26
  Top 0.305: R32.1 115.76,103.16 D11.A
N$27
  Top 0.305: R33.1 116.78,73.7 D12.A
N$28
  Top 0.305: 114.27,79.03 114.25,79.03 OUT5.3
  Top 0.406: OUT5.3 113.68,80.89 113.38,81.19 R34.1
N$29
  Top 0.305: R35.1 117.7,76.11 119.35,77.76 119.35,84.75 120.62,86.02 122.53,86.02 123.16,86.65 123.16,86.58 OUT5.2
N$30
  Top 0.305: R36.2 114.27,100.62 116.81,98.08 123.16,98.08 123.16,98.02 IN5.2
N$31
  Top 0.305: R38.1 155.76,55.16 D13.A
N$32
  Top 0.305: R39.1 156.78,25.7 D14.A
N$33
  Top 0.305: 154.27,31.03 154.25,31.03 OUT6.3
  Top 0.406: OUT6.3 153.68,32.89 153.38,33.19 R40.1
N$34
  Top 0.305: R41.1 157.7,28.11 159.35,29.76 159.35,36.75 160.62,38.02 162.53,38.02 163.16,38.65 163.16,38.59 OUT6.2
N$35
  Top 0.305: R42.2 154.27,52.62 156.81,50.08 163.16,50.08 163.16,50.02 IN6.2
N$36
  Top 0.305: R44.1 155.76,103.16 D15.A
N$37
  Top 0.305: R45.1 156.78,73.7 D16.A
N$38
  Top 0.305: 154.27,79.03 154.25,79.03 OUT7.3
  Top 0.406: OUT7.3 153.68,80.89 153.38,81.19 R46.1
N$39
  Top 0.305: R47.1 157.7,76.11 159.35,77.76 159.35,84.75 160.62,86.02 162.53,86.02 163.16,86.65 163.16,86.58 OUT7.2
N$40
  Top 0.305: R48.2 154.27,100.62 156.81,98.08 163.16,98.08 163.16,98.02 IN7.2
PGC
  Top 0.305: ICSP.5 26.65,20.11 25.73,21.02 IC1.18
PGC1
  Top 0.305: ICSP1.5 26.65,68.11 25.73,69.02 IC2.18
PGC2
  Top 0.305: ICSP2.5 66.65,20.11 65.73,21.02 IC3.18
PGC3
  Top 0.305: ICSP3.5 66.65,68.11 65.73,69.02 IC4.18
PGC4
  Top 0.305: ICSP4.5 106.65,20.11 105.73,21.02 IC5.18
PGC5
  Top 0.305: ICSP5.5 106.65,68.11 105.73,69.02 IC6.18
PGC6
  Top 0.305: ICSP6.5 146.65,20.11 145.74,21.02 IC7.18
PGC7
  Top 0.305: ICSP7.5 146.65,68.11 145.74,69.02 IC8.18
PGD  (via drill 0.8)
  Top 0.305: IC1.19 26.39,21.77 26.78,21.38 v27.92,21.38 | v35.67,21.38 ICSP.4
  Bottom 0.305: v27.92,21.38 v35.67,21.38
PGD1  (via drill 0.8)
  Top 0.305: IC2.19 26.39,69.77 26.78,69.38 v27.92,69.38 | v35.67,69.38 ICSP1.4
  Bottom 0.305: v27.92,69.38 v35.67,69.38
PGD2  (via drill 0.8)
  Top 0.305: IC3.19 66.38,21.77 66.78,21.38 v67.92,21.38 | v75.67,21.38 ICSP2.4
  Bottom 0.305: v67.92,21.38 v75.67,21.38
PGD3  (via drill 0.8)
  Top 0.305: IC4.19 66.38,69.77 66.78,69.38 v67.92,69.38 | v75.67,69.38 ICSP3.4
  Bottom 0.305: v67.92,69.38 v75.67,69.38
PGD4  (via drill 0.8)
  Top 0.305: IC5.19 106.39,21.77 106.78,21.38 v107.92,21.38 | v115.67,21.38 ICSP4.4
  Bottom 0.305: v107.92,21.38 v115.67,21.38
PGD5  (via drill 0.8)
  Top 0.305: IC6.19 106.39,69.77 106.78,69.38 v107.92,69.38 | v115.67,69.38 ICSP5.4
  Bottom 0.305: v107.92,69.38 v115.67,69.38
PGD6  (via drill 0.8)
  Top 0.305: IC7.19 146.38,21.77 146.78,21.38 v147.92,21.38 | v155.67,21.38 ICSP6.4
  Bottom 0.305: v147.92,21.38 v155.67,21.38
PGD7  (via drill 0.8)
  Top 0.305: IC8.19 146.38,69.77 146.78,69.38 v147.92,69.38 | v155.67,69.38 ICSP7.4
  Bottom 0.305: v147.92,69.38 v155.67,69.38
RX
  Top 0.305: IC1.5 24.43,32.48 21.44,35.48 21.44,44.87 22.84,46.27 R3.1 29.57,46.34 29.57,47.92 30.78,49.13 R2.1
RX1
  Top 0.305: IC2.5 24.43,80.48 21.44,83.47 21.44,92.87 22.84,94.27 R7.1 29.57,94.34 29.57,95.92 30.78,97.13 R12.1
RX2
  Top 0.305: IC3.5 64.44,32.48 61.44,35.48 61.44,44.87 62.84,46.27 R13.1 69.57,46.34 69.57,47.92 70.78,49.13 R18.1
RX3
  Top 0.305: IC4.5 64.44,80.48 61.44,83.47 61.44,92.87 62.84,94.27 R19.1 69.57,94.34 69.57,95.92 70.78,97.13 R24.1
RX4
  Top 0.305: IC5.5 104.44,32.48 101.44,35.48 101.44,44.87 102.84,46.27 R25.1 109.57,46.34 109.57,47.92 110.78,49.13 R30.1
RX5
  Top 0.305: IC6.5 104.44,80.48 101.44,83.47 101.44,92.87 102.84,94.27 R31.1 109.57,94.34 109.57,95.92 110.78,97.13 R36.1
RX6
  Top 0.305: IC7.5 144.44,32.48 141.44,35.48 141.44,44.87 142.84,46.27 R37.1 149.57,46.34 149.57,47.92 150.78,49.13 R42.1
RX7
  Top 0.305: IC8.5 144.44,80.48 141.44,83.47 141.44,92.87 142.84,94.27 R43.1 149.57,94.34 149.57,95.92 150.78,97.13 R48.1
TX
  Top 0.305: IC1.6 23.79,27.55 24.11,27.22 26.52,27.22 27.41,28.11 R5.2
TX1
  Top 0.305: IC2.6 23.79,75.55 24.11,75.22 26.52,75.22 27.41,76.11 R11.2
TX2
  Top 0.305: IC3.6 63.78,27.55 64.11,27.22 66.52,27.22 67.41,28.11 R17.2
TX3
  Top 0.305: IC4.6 63.78,75.55 64.11,75.22 66.52,75.22 67.41,76.11 R23.2
TX4
  Top 0.305: IC5.6 103.78,27.55 104.11,27.22 106.52,27.22 107.41,28.11 R29.2
TX5
  Top 0.305: IC6.6 103.78,75.55 104.11,75.22 106.52,75.22 107.41,76.11 R35.2
TX6
  Top 0.305: IC7.6 143.78,27.55 144.11,27.22 146.52,27.22 147.41,28.11 R41.2
TX7
  Top 0.305: IC8.6 143.78,75.55 144.11,75.22 146.52,75.22 147.41,76.11 R47.2
VPP  (via drill 0.8)
  Top 0.305: ICSP.1 v31.73,22.65 | IC1.4 25.09,28.79 v25.13,28.74
  Bottom 0.305: v31.73,22.65 29.7,22.65 25.13,27.22 v25.13,28.74
VPP1  (via drill 0.8)
  Top 0.305: ICSP1.1 v31.73,70.65 | IC2.4 25.09,76.78 v25.13,76.74
  Bottom 0.305: v31.73,70.65 29.7,70.65 25.13,75.22 v25.13,76.74
VPP2  (via drill 0.8)
  Top 0.305: ICSP2.1 v71.73,22.65 | IC3.4 65.09,28.79 v65.13,28.74
  Bottom 0.305: v71.73,22.65 69.7,22.65 65.13,27.22 v65.13,28.74
VPP3  (via drill 0.8)
  Top 0.305: ICSP3.1 v71.73,70.65 | IC4.4 65.09,76.78 v65.13,76.74
  Bottom 0.305: v71.73,70.65 69.7,70.65 65.13,75.22 v65.13,76.74
VPP4  (via drill 0.8)
  Top 0.305: ICSP4.1 v111.73,22.65 | IC5.4 105.08,28.79 v105.13,28.74
  Bottom 0.305: v111.73,22.65 109.7,22.65 105.13,27.22 v105.13,28.74
VPP5  (via drill 0.8)
  Top 0.305: ICSP5.1 v111.73,70.65 | IC6.4 105.08,76.78 v105.13,76.74
  Bottom 0.305: v111.73,70.65 109.7,70.65 105.13,75.22 v105.13,76.74
VPP6  (via drill 0.8)
  Top 0.305: ICSP6.1 v151.73,22.65 | IC7.4 145.09,28.79 v145.13,28.74
  Bottom 0.305: v151.73,22.65 149.7,22.65 145.13,27.22 v145.13,28.74
VPP7  (via drill 0.8)
  Top 0.305: ICSP7.1 v151.73,70.65 | IC8.4 145.09,76.78 v145.13,76.74
  Bottom 0.305: v151.73,70.65 149.7,70.65 145.13,75.22 v145.13,76.74

## Text on the board
tPlace: hotchk155/2022 | hotchk155/2022 | hotchk155/2022 | hotchk155/2022 | MIDI NUBBIN V3 | MIDI NUBBIN V3 | MIDI NUBBIN V3 | MIDI NUBBIN V3 | hotchk155/2022 | hotchk155/2022 | hotchk155/2022 | hotchk155/2022 | MIDI NUBBIN V3 | MIDI NUBBIN V3 | MIDI NUBBIN V3 | MIDI NUBBIN V3
_tNames: R1 | R1 | R1 | R1 | D1 | D1 | D1 | D1 | R2 | R2 | R2 | R2 | IN | IN | IN | IN | R3 | R3 | R3 | R3 | C1 | C1 | C1 | C1 | R4 | R4 | R4 | R4 | C2 | C2 | C2 | C2 | OUT | OUT | OUT | OUT | R5 | R5 | R5 | R5 | D2 | D2 | D2 | D2 | R6 | R6 | R6 | R6 | IC1 | IC1 | IC1 | IC1 | ICSP | ICSP | ICSP | ICSP | R1 | R1 | R1 | R1 | D1 | D1 | D1 | D1 | R2 | R2 | R2 | R2 | IN | IN | IN | IN | R3 | R3 | R3 | R3 | C1 | C1 | C1 | C1 | R4 | R4 | R4 | R4 | C2 | C2 | C2 | C2 | OUT | OUT | OUT | OUT | R5 | R5 | R5 | R5 | D2 | D2 | D2 | D2 | R6 | R6 | R6 | R6 | IC1 | IC1 | IC1 | IC1 | ICSP | ICSP | ICSP | ICSP